# Altium PCB PCB1.PcbDoc
Units mm, origin at the board's own origin, x right, y up, seen from the top; angles counter-clockwise.
Board outline 50 x 50 mm, 2 copper layers (Top Layer, Bottom Layer); 31 components, 24 nets, 81 pads, 16 vias.
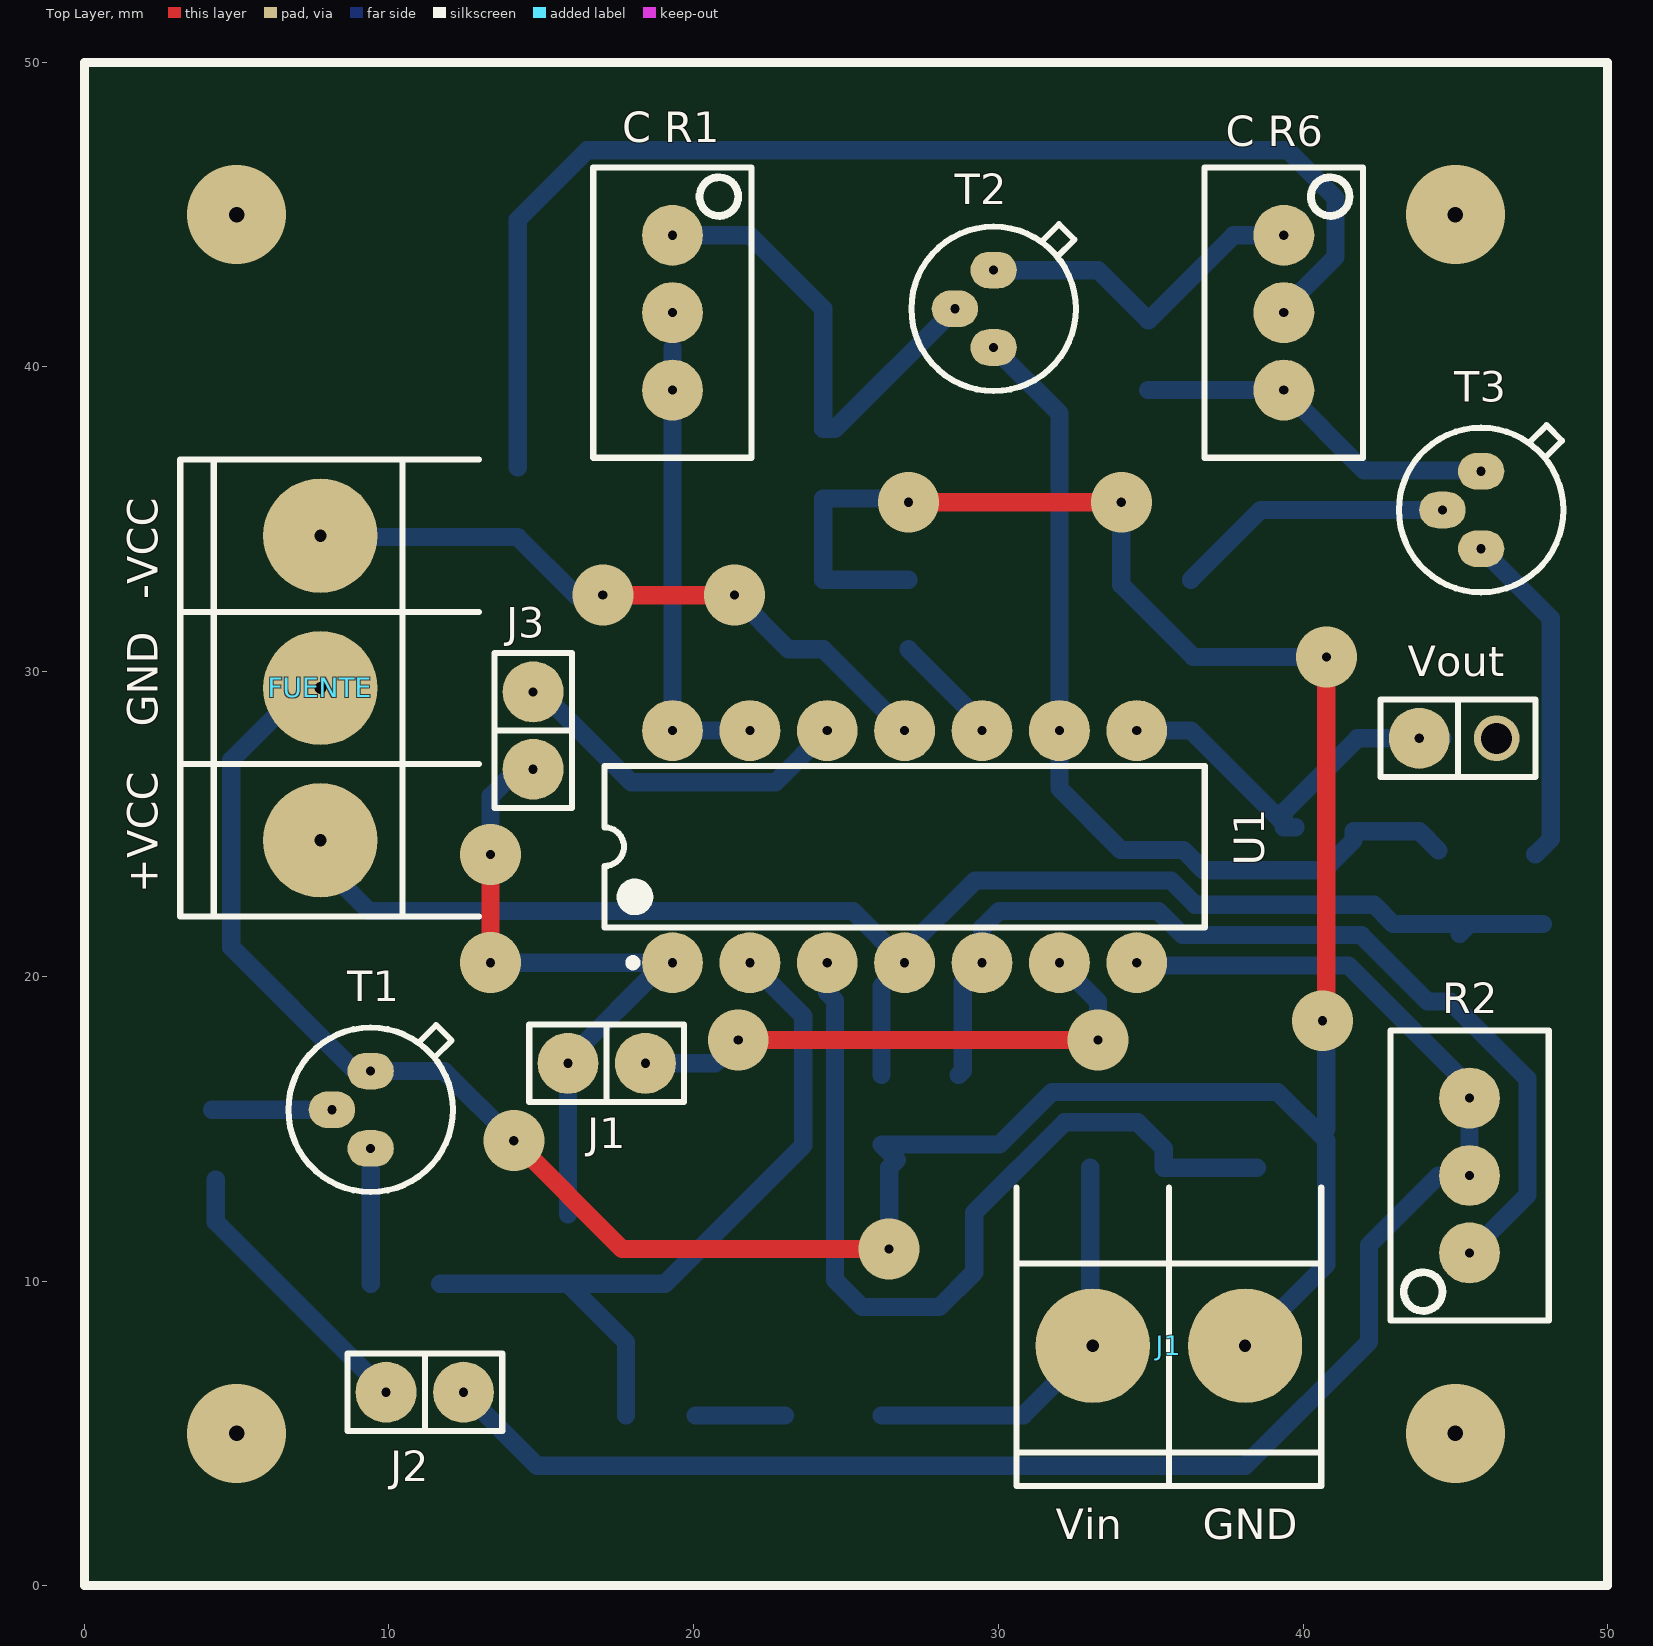
[diagram p0: Top Layer view]
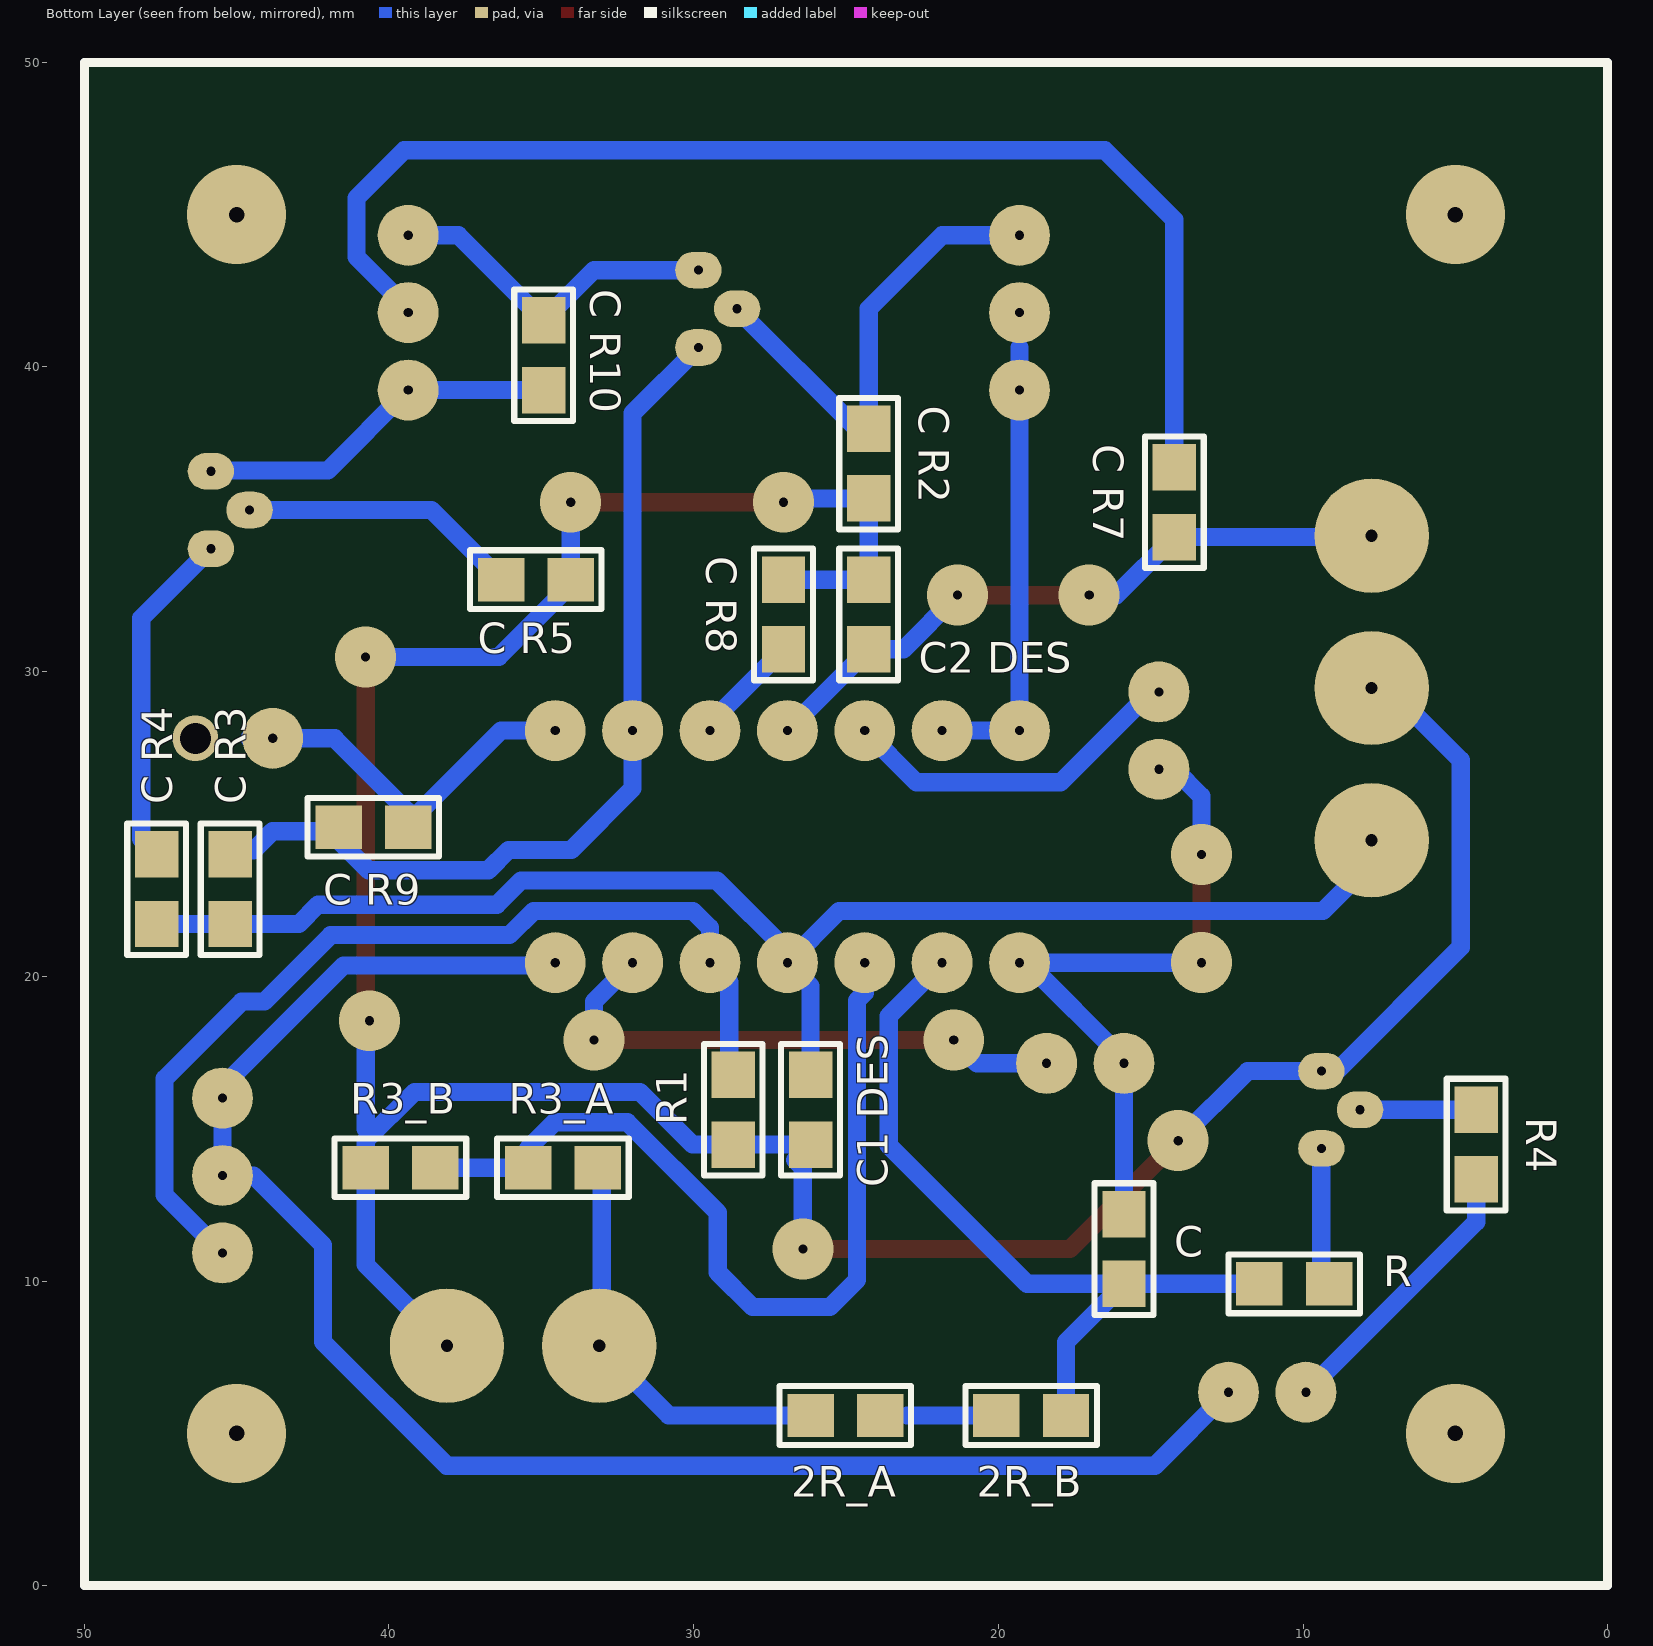
[diagram p1: Bottom Layer view, seen from below]
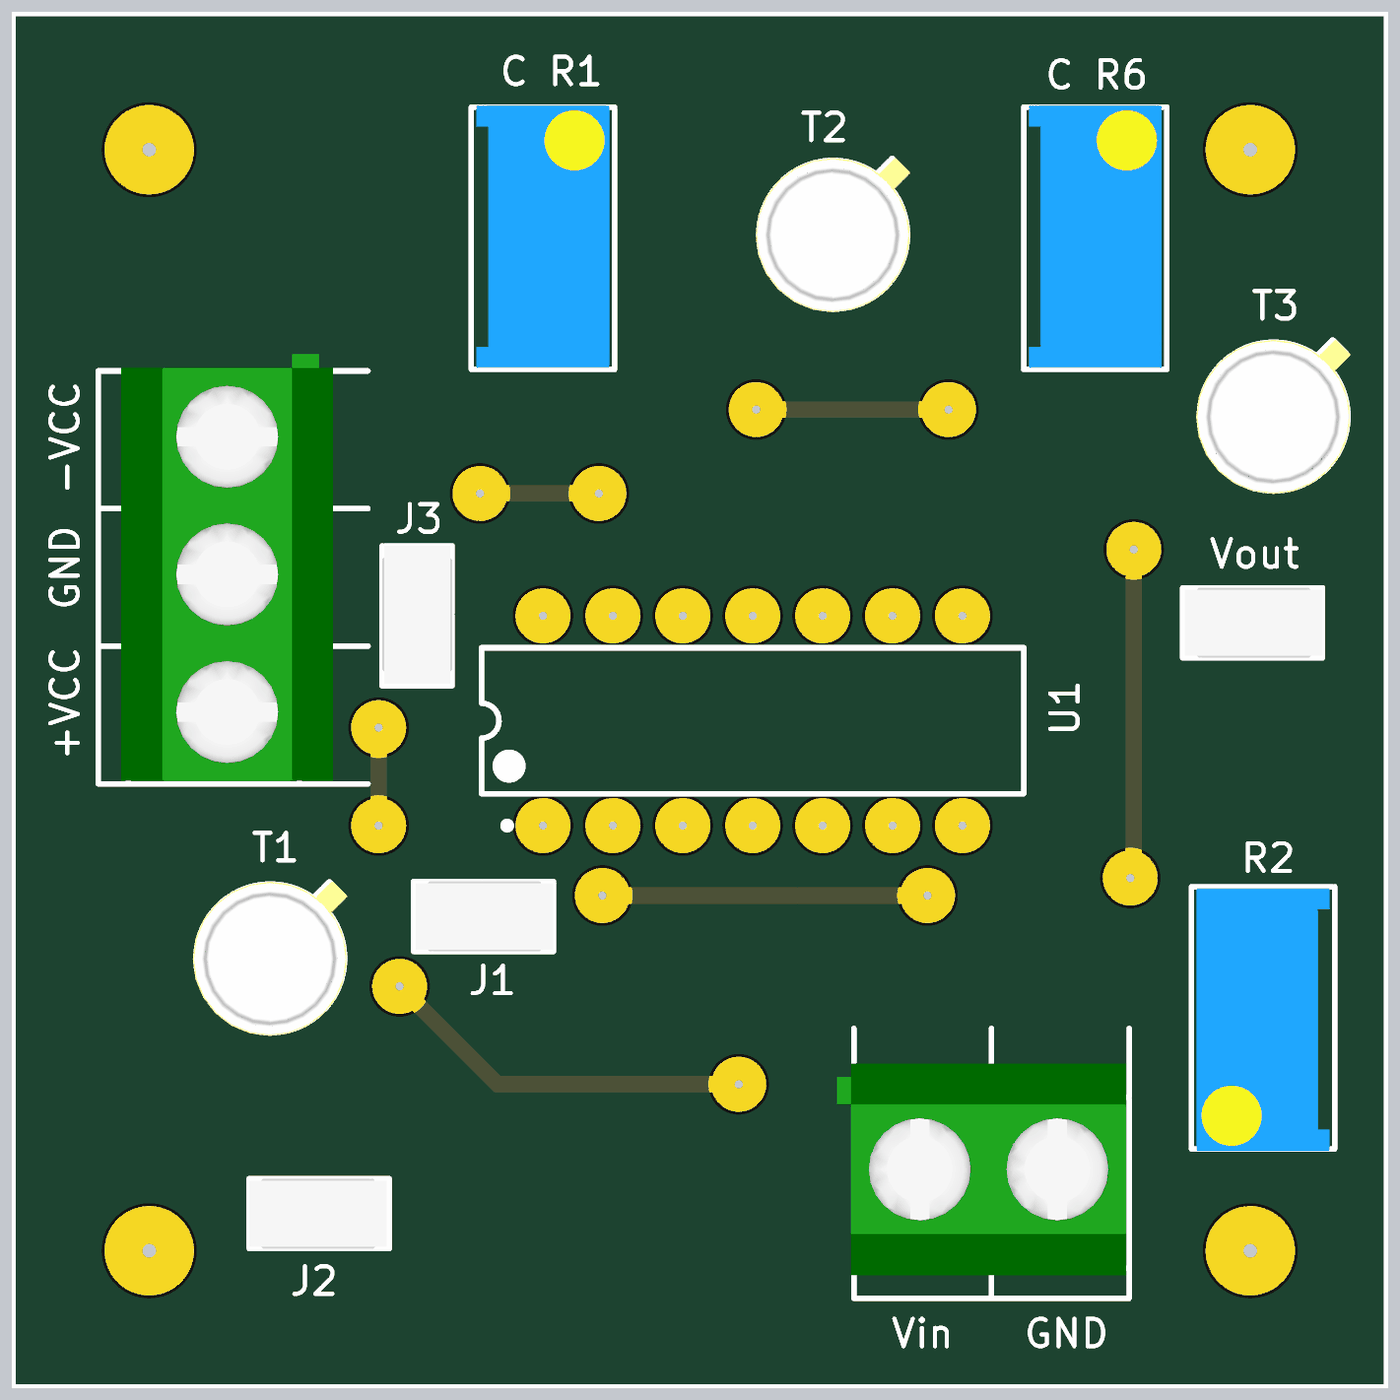
[diagram p2: 3D render of the assembled board from above, using the file's embedded part models]
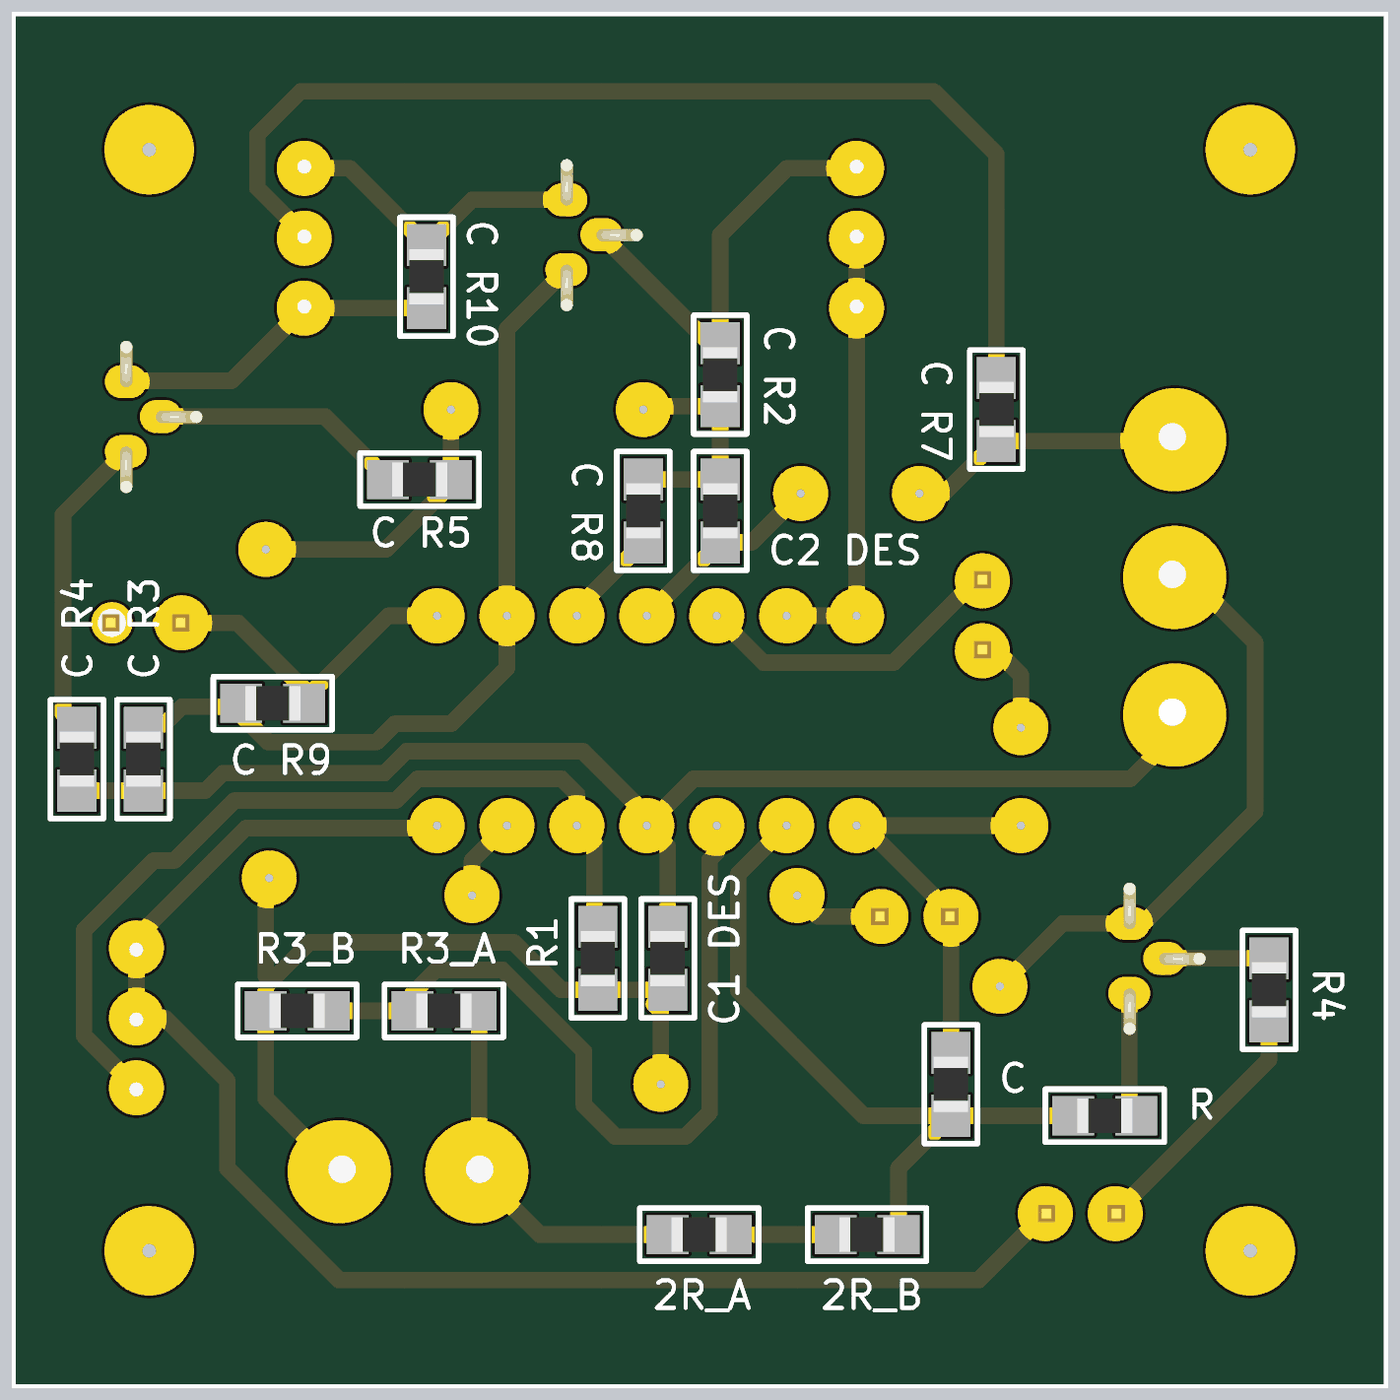
[diagram p3: 3D render of the assembled board from below, using the file's embedded part models]

## Layer stack, top to bottom
Top Solder: solder mask 0.0102, Solder Resist, Dk 3.5
Top Layer: signal copper 0.0356
Dielectric 1: dielectric 0.32, FR-4, Dk 4.8
Bottom Layer: signal copper 0.0356
Bottom Solder: solder mask 0.0102, Solder Resist, Dk 3.5

## Board outline
0,0 50,0 50,50 0,50

## Design rules (kind name [scope] priority, off if disabled: settings)
Clearance [All] p1: gap=0.4 ignorepadtopadclearanceinfootprint=FALSE
PolygonConnect [All] p1: connectstyle=Relief reliefconductorwidth=0.254 reliefentries=4 polygonreliefangle="90 Angle" airgapwidth=0.254
RoutingVias [All] p1: holewidth=0.4 width=2 viastyle="Through Hole" minholewidth=0.3 minwidth=2 maxholewidth=0.5 maxwidth=2
SolderMaskExpansion [All] p1: expansion=0.102
Width [All] p1: maxlimit=0.6 minlimit=0.5 preferedwidth=0.6
30 further rules are at their usual default settings.

## Components (designator, comment, footprint, x,y, rotation, side; value= is the part's Value field where it differs from the comment)
2R_A "RES" 0805 25.019,5.588 r180 bottom
2R_B "RES" 0805 18.923,5.588 r180 bottom
C "CAP" 0805 15.875,11.049 r90 bottom
"C1 DES" "CAP" 0805 26.162,15.621 r90 bottom
"C2 DES" "CAP" 0805 24.257,31.877 r270 bottom
"C R1" "PRESET" "PRESET V" 19.304,41.783 r90 top
"C R2" "RES" 0805 24.257,36.83 r90 bottom
"C R3" "RES" 0805 45.212,22.86 r270 bottom
"C R4" "RES" 0805 47.625,22.86 r270 bottom
"C R5" "RES" 0805 35.179,33.02 r0 bottom
"C R6" "PRESET" "PRESET V" 39.37,41.783 r90 top
"C R7" "RES" 0805 14.224,35.56 r270 bottom
"C R8" "RES" 0805 27.051,31.877 r270 bottom
"C R9" "RES" 0805 40.513,24.892 r0 bottom
"C R10" "RES" 0805 34.925,40.386 r90 bottom
FUENTE "BORNERA 3" BORNERA3 7.747,29.464 r0 top
J1 "JUMPER" JUMPER2#1 17.145,17.145 r0 top (schematic designator JUMPER1)
J1 "BORNERA 2" BORNERA2 35.6,7.874 r90 top
J2 "JUMPER" JUMPER2#1 11.176,6.35 r180 top (schematic designator JUMPER2)
J3 "JUMPER" JUMPER2#1 14.732,28.067 r90 top (schematic designator JUMPER3)
R "RES" 0805 10.287,9.906 r0 bottom
R1 "RES" 0805 28.702,15.621 r90 bottom
R2 "PRESET" "PRESET V" 45.466,13.462 r270 top
R3_A "RES" 0805 34.29,13.716 r180 bottom
R3_B "RES" 0805 39.624,13.716 r180 bottom
R4 "RES" 0805 4.318,14.478 r270 bottom
T1 "2N2222" TO18 9.398,15.621 r180 top
T2 "2N2222" TO18 29.845,41.91 r180 top
T3 "2N2222" TO18 45.847,35.306 r180 top
U1 "TL084ACN" TI-N14 26.924,24.257 r90 top
Vout "JUMPER" JUMPER2#2 45.085,27.813 r0 top

## Footprints (in the part's own frame and the unit in brackets; to place one, negate y for a bottom-side part, rotate by r counter-clockwise, add the part's x,y. Pads: shape width x height; smd on the part's side, far side on the other; paste and mask are expansions set on the pad)
0805 [mil] "Pasivo 0805"
  rect 60x56 smd: 1(-45,0) 2(45,0)
  silkscreen extent -85,-38 85,38, body extent -39,-25 39,25, height 15
BORNERA2 [mm] "Bornera con Tornillos 5mm separación"
  round 3.75 hole 0.4: 1(0,2.5) 2(0,-2.5)
  silkscreen extent -4.6,-5 5.2,5, body extent -3.76,-4.89 3.94,5.61, height 10
BORNERA3 [mm] "Bornera con Tornillos 5mm separación"
  round 3.75 hole 0.4: 1(0,5) 2(0,0) 3(0,-5)
  silkscreen extent -4.6,-7.5 5.2,7.5, body extent -3.76,-7.39 3.94,8.11, height 10.05
JUMPER2#1 [mm]
  round 2 hole 0.3: 1(-1.27,0) 2(1.27,0)
  silkscreen extent -2.54,-1.27 2.54,1.27, body extent -2.46,-1.27 2.54,1.27, height 9.5
JUMPER2#2 [mm]
  round 2 hole 0.3: 1(-1.27,0)
  round 1.5 hole 1.016: 2(1.27,0)
  silkscreen extent -2.54,-1.27 2.54,1.27, body extent -2.46,-1.27 2.54,1.27, height 9.5
"PRESET V" [mm]
  round 2 hole 0.3: 1(-2.54,0) 2(0,0) 3(2.54,0)
  silkscreen extent -4.76,-2.6 4.76,2.6, body extent -4.7,-2.42 4.83,2.42, height 11.55
TI-N14 [mm] "DIP, 14-Leads, Body 19.305x6.35 mm, Pitch 2.54 mm"
  round 2 hole 0.3: 1(-3.81,7.62) 2(-3.81,5.08) 3(-3.81,2.54) 4(-3.81,0) 5(-3.81,-2.54) 6(-3.81,-5.08) 7(-3.81,-7.62) 8(3.81,-7.62) 9(3.81,-5.08) 10(3.81,-2.54) 11(3.81,0) 12(3.81,2.54) 13(3.81,5.08) 14(3.81,7.62)
  silkscreen extent -3.93,-9.85 2.65,9.85, body extent -3.3,-9.85 3.3,9.85, height 5.08
TO18 [mm]
  oval 1.524x1.2 hole 0.3: 1(1.27,0) 2(0,-1.27) 3(0,1.27)
  silkscreen extent -2.7,-2.78 2.7,2.7, body extent -2.79,-2.79 2.81,2.81, height 4.6

## Part data
U1: "JFET-Input Operational Amplifier, 7 to 36 V, 0 to 70 degC, 14-pin DIP (N14), Pb-Free (RoHS)", Manufacturer="Texas Instruments", Rating=Catalog, Supplier Part Number 1=296-1782-5-ND, Total Supply Voltage(Max)(+5V is 5, +/-5V is 10)=36, Total Supply Voltage(Min)(+5V is 5, +/-5V is 10)=7, CMRR(Min)(dB)=75, Code_JEDEC=MS-001, ComponentLink1Description="Manufacturer URL", ComponentLink1URL=http://www.ti.com/, ComponentLink2Description=Datasheet, ComponentLink2URL=http://www.ti.com/lit/ds/symlink/tl084a.pdf, ComponentLink3Description="Package Specification", ComponentLink3URL=http://www.ti.com/lit/ml/mpdi002c/mpdi002c.pdf, DatasheetVersion=SLOS081G, Eco-Plan="Pb-Free (RoHS)", GBW(Typ)(MHz)=3, IIB(Max)(pA)=200, Iq per channel(Max)(mA)=2.8, Mounting Technology="Through Hole", Number of Channels=4, Offset Drift(Typ)(uV/C)=18, PackageDescription="14-Pin Plastic In-Line, Body 19.305 x 6.35 mm, Pitch 2.54 mm", PackageReference=N14, PackageVersion="4040049/E, 12/2002", PartNumber=TL084ACN, Slew Rate(Typ)(V/us)=13, Sub Family="General Purpose Amplifier, High Supply Voltage Amplifier (>=30V)", Supplier 1=Digi-Key, Supplier 2=Farnell, Supplier 3=Newark, Supplier 4=Mouser, Supplier Part Number 2=1106129, Supplier Part Number 3=08F9361, Supplier Part Number 4=595-TL084ACN, Vio (25C)(Max)(mV)=6, Vn at 1kHz(Typ)(nV/rtHz)=18

## Via types
v1: diameter 2, hole 0.3, Top Layer to Bottom Layer, 12 vias
v2: diameter 3.25, hole 0.5, Top Layer to Bottom Layer, 4 vias

## Nets (pads, with @x,y where several pads share a name; then routed paths per layer and width w, separated by ;. In a path a pad name is that pad's centre, name@x,y a point inside that pad or via, vN(x,y) a via of type N, cw(c..) or ccw(c..) an arc to the next point about the centre after c; other vN are vias at no path point)
+VCC: "C1 DES.2" "C R3.2" "C R4.2" FUENTE.3 U1.4 | length 49.3
  Bottom Layer w0.6: FUENTE.3@7.112,24.384 9.349,22.147 25.224,22.147 U1.4 ; 26.162,16.764 26.162,19.685 26.679,20.202 26.924,19.958 U1.4 ; 45.148,21.399 45.466,21.717 ; 47.879,21.717 45.466,21.717 ; U1.4 26.924,20.828 29.243,23.147 35.662,23.147 36.456,22.354 42.324,22.354 42.96,21.717 45.212,21.717 45.466,21.717
-VCC: "C2 DES.2" "C R7.2" FUENTE.1 U1.11 | length 22.5
  Top Layer w0.6: v1(17.018,32.512) v1(21.336,32.512)
  Bottom Layer w0.6: FUENTE.1@7.112,34.384 7.145,34.417 14.224,34.417 16.129,32.512 v1(17.018,32.512) ; v1(21.336,32.512) 23.114,30.734 24.257,30.734 U1.11
GND: "C1 DES.1" "C2 DES.1" "C R2.1" "C R5.1" "C R8.1" FUENTE.2 J1.2@38.1,7.874 R1.1 R3_B.1 T1.2 | length 104
  Top Layer w0.6: v1(14.097,14.605) 17.653,11.049 v1(26.416,11.049) ; v1(27.051,35.56) v1(34.036,35.56) ; v1(40.64,18.542) 40.767,18.669 v1(40.767,30.48)
  Bottom Layer w0.6: FUENTE.2@7.112,29.384 4.826,27.098 4.826,20.955 8.89,16.891 T1.2 11.811,16.891 v1(14.097,14.605) ; v1(26.416,11.049) 26.416,13.716 26.67,13.97 26.162,14.478 R1.1 30.032,14.478 31.761,16.207 39.165,16.207 40.767,14.605 R3_B.1 40.767,10.541 J1.2@38.1,7.874 ; 27.051,33.02 24.257,33.02 24.257,35.687 26.924,35.687 v1(27.051,35.56) ; v1(34.036,35.56) 34.036,33.02 34.036,32.843 36.399,30.48 v1(40.767,30.48) ; v1(40.64,18.542) 40.767,18.415 40.767,14.986
Net2R_A_1: 2R_A.1 J1.1@33.1,7.874 R3_A.2 | length 13.8
  Bottom Layer w0.6: 2R_A.1 30.814,5.588 33.1,7.874 33.02,7.954 R3_A.2@33.02,13.716
Net2R_A_2: 2R_A.2 2R_B.1 | length 2.9
  Bottom Layer w0.6: 2R_B.1 22.987,5.588
Net2R_B_2: 2R_B.2 C.1 R.2 U1.2 | length 25.6
  Bottom Layer w0.6: R.2@11.684,9.906 C.1 ; 2R_B.2 17.78,8.001 C.1 ; U1.2 23.601,18.69 23.601,14.457 19.05,9.906 C.1
"NetC R1_1": "C R1.1" "C R1.2" U1.13 U1.14 | length 15.1
  Bottom Layer w0.6: 19.304,40.64 19.304,39.243 19.304,38.989 19.304,38.1 U1.14 U1.13
"NetC R1_3": "C R1.3" "C R2.2" T2.1 | length 15.8
  Bottom Layer w0.6: 19.304,44.323 21.844,44.323 24.257,41.91 24.257,37.973 24.638,37.973 T2.1
"NetC R3_1": "C R3.1" "C R9.2" T2.3 U1.9 | length 29.9
  Bottom Layer w0.6: T2.3 32.004,38.481 U1.9 32.004,26.162 34.019,24.147 36.077,24.147 36.743,23.481 40.676,23.481 41.656,24.461 41.656,24.765 43.815,24.765 44.45,24.13
"NetC R4_1": "C R4.1" "C R8.2" T3.3 U1.10 | length 14.9
  Bottom Layer w0.6: 27.051,30.734 29.464,28.321 U1.10 ; T3.3 48.133,31.75 48.133,24.511 47.625,24.003
"NetC R5_2": "C R5.2" T3.1 | length 9.2
  Bottom Layer w0.6: 36.322,33.02 38.608,35.306 T3.1
"NetC R6_1": "C R6.1" "C R10.1" T3.2 | length 12
  Bottom Layer w0.6: 34.925,39.243 39.37,39.243 42.007,36.606 45.847,36.606 T3.2
"NetC R6_2": "C R6.2" "C R7.1" | length 41.2
  Bottom Layer w0.6: 14.224,36.703 14.224,44.831 16.51,47.117 39.497,47.117 41.07,45.544 41.07,43.61 39.243,41.783 39.37,41.783
"NetC R6_3": "C R6.3" "C R10.2" T2.2 | length 11.4
  Bottom Layer w0.6: T2.2 33.274,43.18 34.925,41.529 37.719,44.323 39.37,44.323
"NetC R9_1": "C R9.1" U1.8 Vout.1 | length 13.2
  Bottom Layer w0.6: U1.8 36.322,28.067 39.37,25.019 ; 39.37,24.892 39.37,25.019 ; 39.751,24.892 39.497,24.892 39.37,25.019 ; Vout.1@44.577,27.813 41.783,27.813 39.37,25.4 39.37,25.019
NetJUMPER1_2: J1.2@18.415,17.145 U1.6 | length 18.2
  Top Layer w0.6: v1(21.463,17.907) v1(33.274,17.907)
  Bottom Layer w0.6: J1.2@18.415,17.145 20.701,17.145 v1(21.463,17.907) ; U1.6 33.274,19.177 v1(33.274,17.907)
NetJUMPER2_1: J2.1 R2.1 R2.2 U1.7 | length 55.4
  Bottom Layer w0.6: J2.1 14.859,3.937 38.1,3.937 42.164,8.001 42.164,11.176 44.45,13.462 R2.2 R2.1 45.466,16.383 41.495,20.354 34.637,20.354 U1.7
NetJUMPER2_2: J2.2 R4.2 | length 9.3
  Bottom Layer w0.6: R4.2 4.318,11.938 J2.2
NetJUMPER3_2: J3.2 U1.12 | length 11.7
  Bottom Layer w0.6: J3.2@14.605,29.337 14.986,29.337 17.956,26.367 22.684,26.367 U1.12
NetR1_2: R1.2 R2.3 U1.5 | length 32.1
  Bottom Layer w0.6: R1.2 28.829,16.891 28.829,19.812 U1.5 29.464,21.592 30.019,22.147 35.248,22.147 36.041,21.354 41.909,21.354 44.086,19.177 44.831,19.177 47.371,16.637 47.371,12.827 R2.3
NetR3_A_1: R3_A.1 R3_B.2 U1.3 | length 29.4
  Bottom Layer w0.6: U1.3 24.384,19.463 24.638,19.209 24.638,10.033 25.527,9.144 28.067,9.144 29.21,10.287 29.21,12.242 32.175,15.207 34.577,15.207 35.433,14.351 R3_A.1 R3_B.2
NetR4_1: R4.1 T1.1 | length 3.9
  Bottom Layer w0.6: R4.1@4.191,15.621 T1.1
NetR_1: R.1 T1.3 | length 4.4
  Bottom Layer w0.6: R.1@9.398,9.906 T1.3
VTR: C.2 J1.1@15.875,17.145 J3.1 U1.1 | length 22.3
  Top Layer w0.6: v1(13.335,20.447) v1(13.335,24.003)
  Bottom Layer w0.6: v1(13.335,20.447) U1.1@19.05,20.447 ; v1(13.335,24.003) 13.335,25.908 J3.1@14.224,26.797 ; C.2 15.875,17.145 15.875,17.272 U1.1@19.05,20.447 ; U1.1 U1.1@19.05,20.447
pads on no net: Vout.2
copper on no net: | length 400
  Bottom Layer w0.3: 0,0 0,50 ; 0,0 50,0 ; 0,0 0,50 ; 0,0 50,0 ; 0,50 50,50 ; 0,50 50,50 ; 50,0 50,50 ; 50,0 50,50
  other v2: 5,5 45,5 5,45 45,45

## Silkscreen, mask and mechanical layers (free items; w line width, h text height)
Top Overlay:
  the board outline again, w0.3
  text "-VCC" at 2.413,32.385 h1 r90
  text "GND" at 2.413,28.194 h1 r90
  text "+VCC" at 2.413,22.733 h1 r90
  text "Vin" at 31.877,1.524 h1
  text "GND" at 36.703,1.524 h1
Bottom Overlay:
  the board outline again, w0.3